# Altium PCB 信号层.PcbDoc
Units mm, origin at the board's own origin, x right, y up, seen from the top; angles counter-clockwise.
Board outline 50.8 x 35.56 mm, 2 copper layers (Top, Bottom); 47 components, 32 nets, 181 pads, 98 vias.
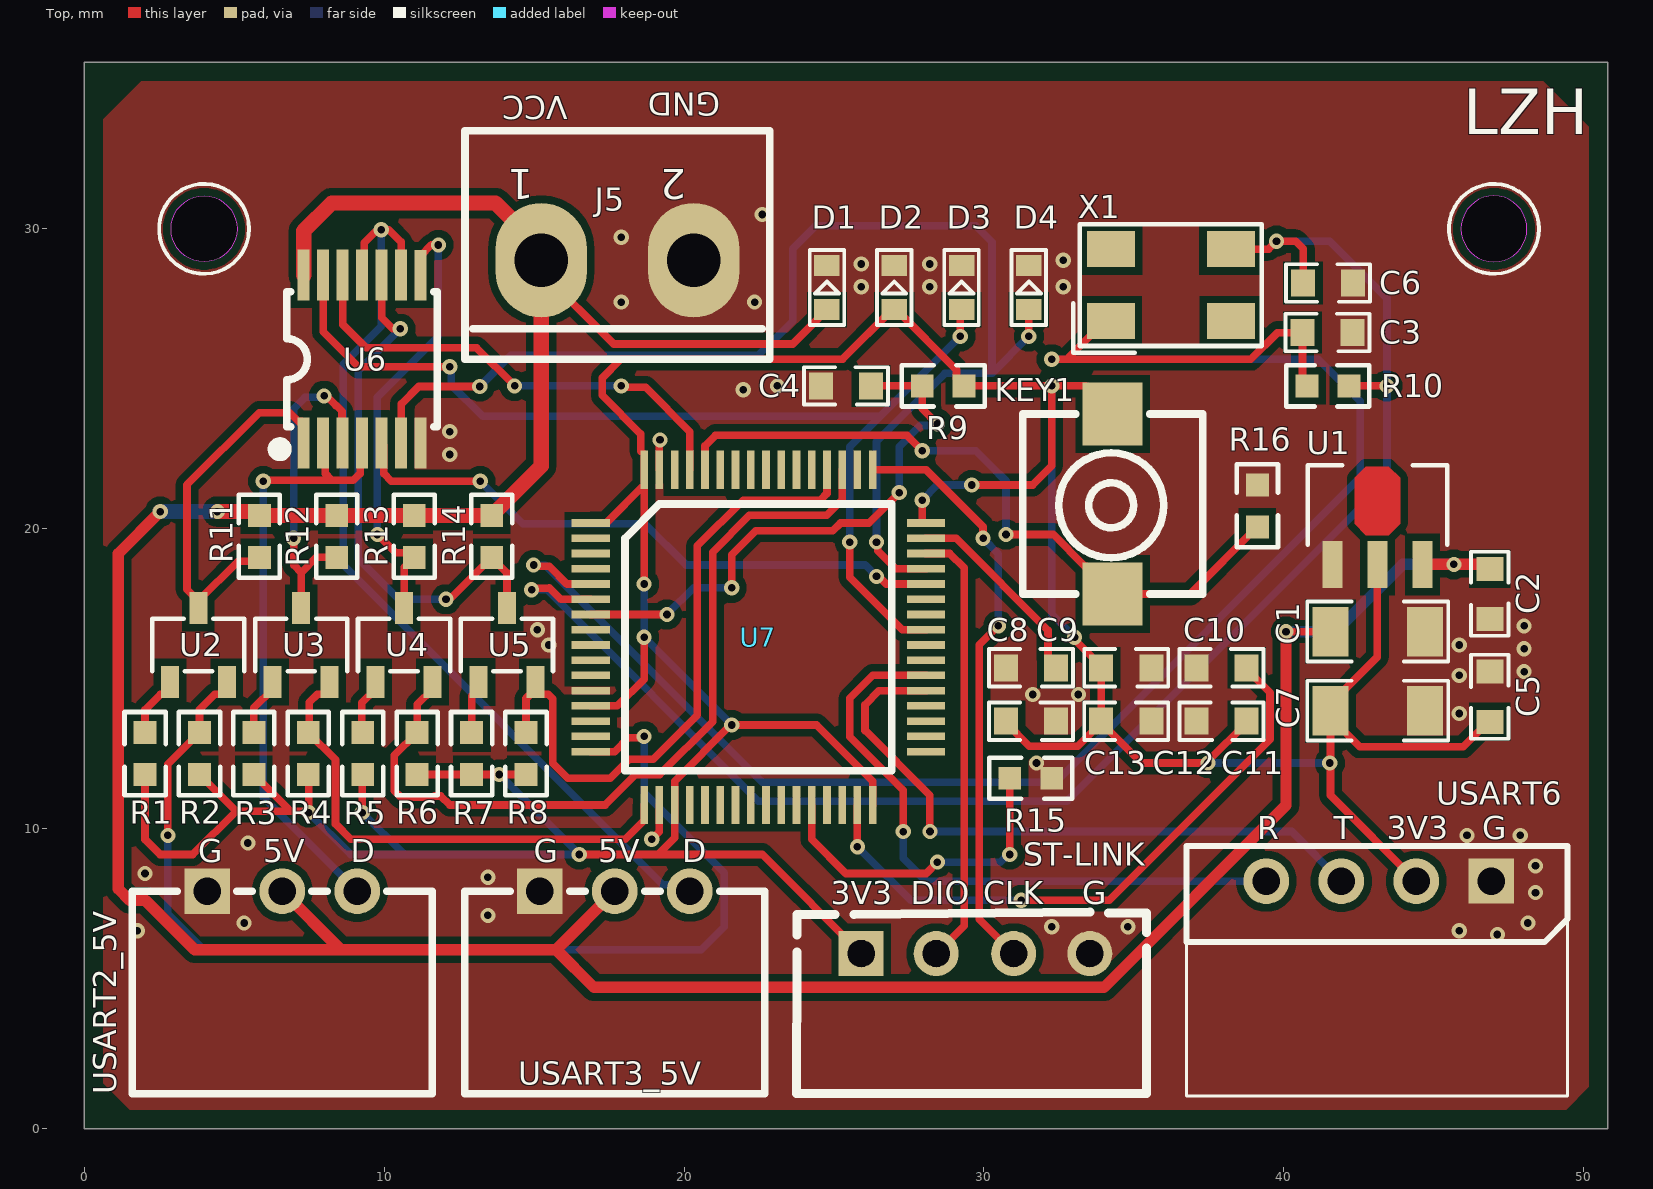
[diagram p0: Top view]
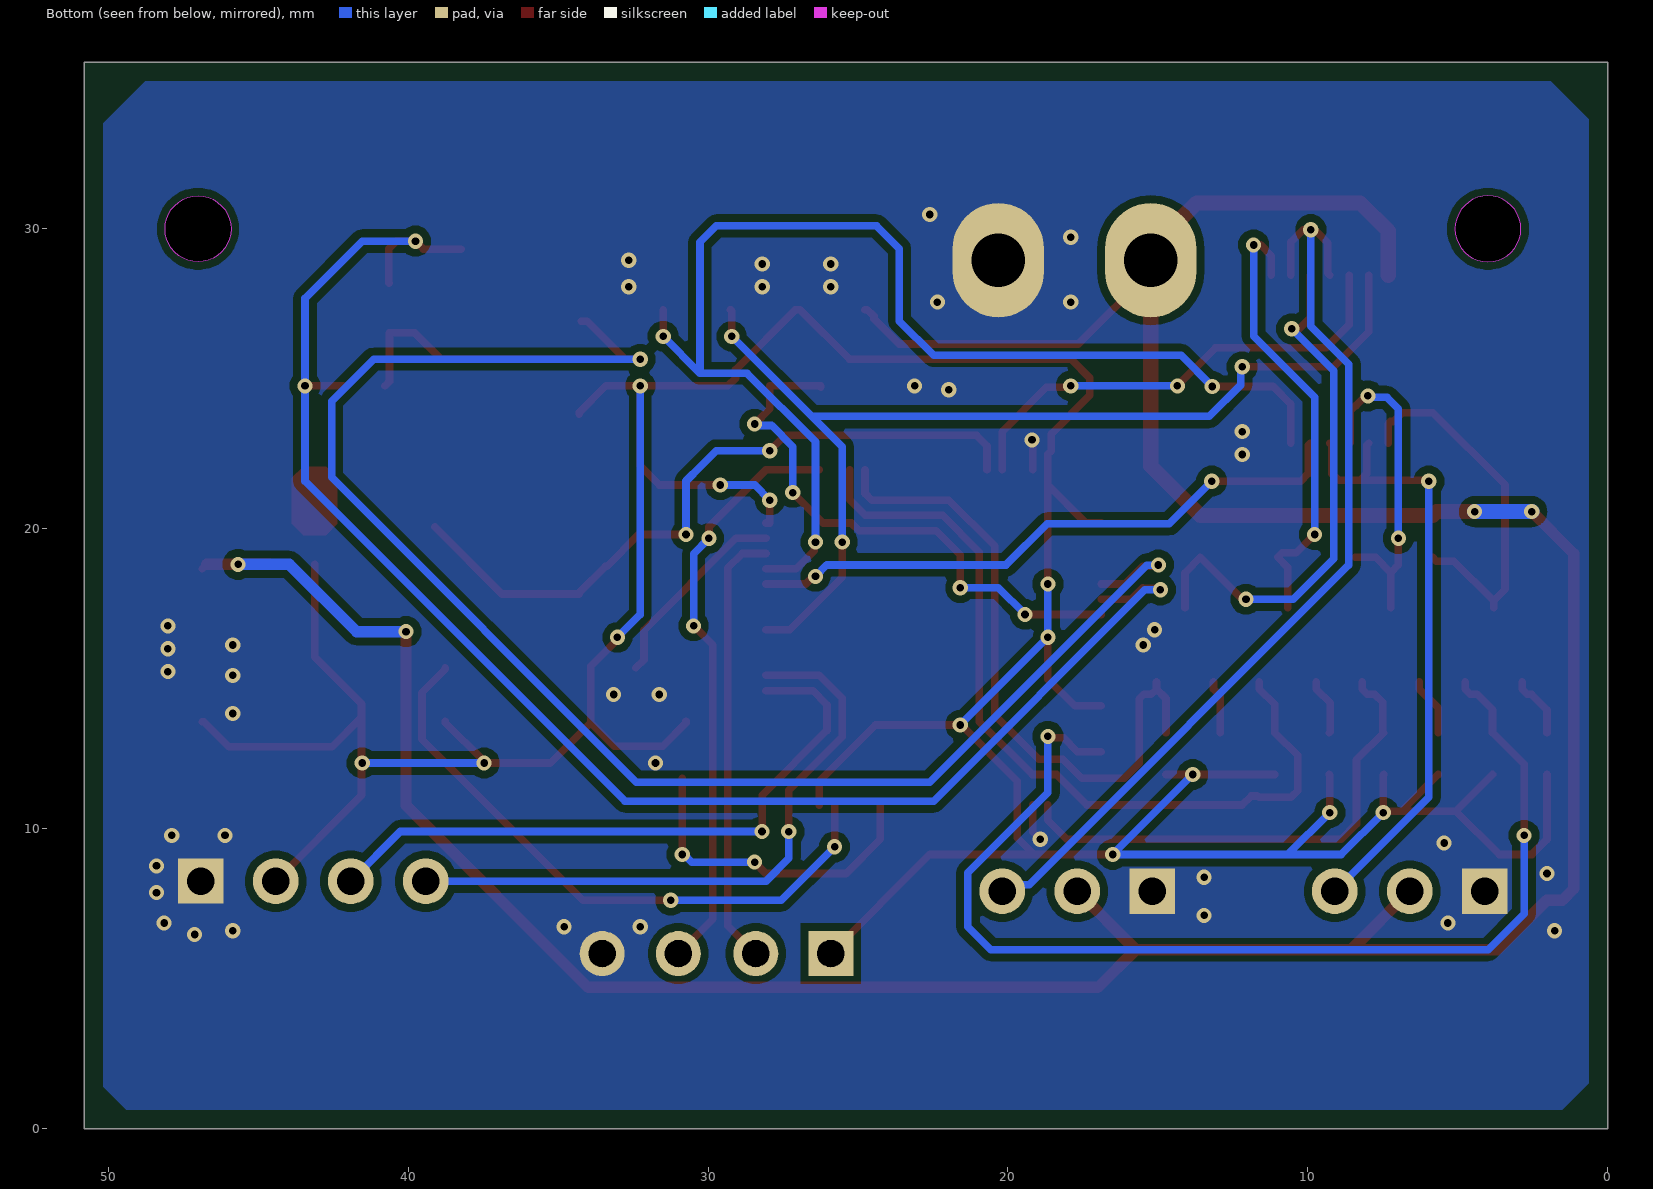
[diagram p1: Bottom view, seen from below]
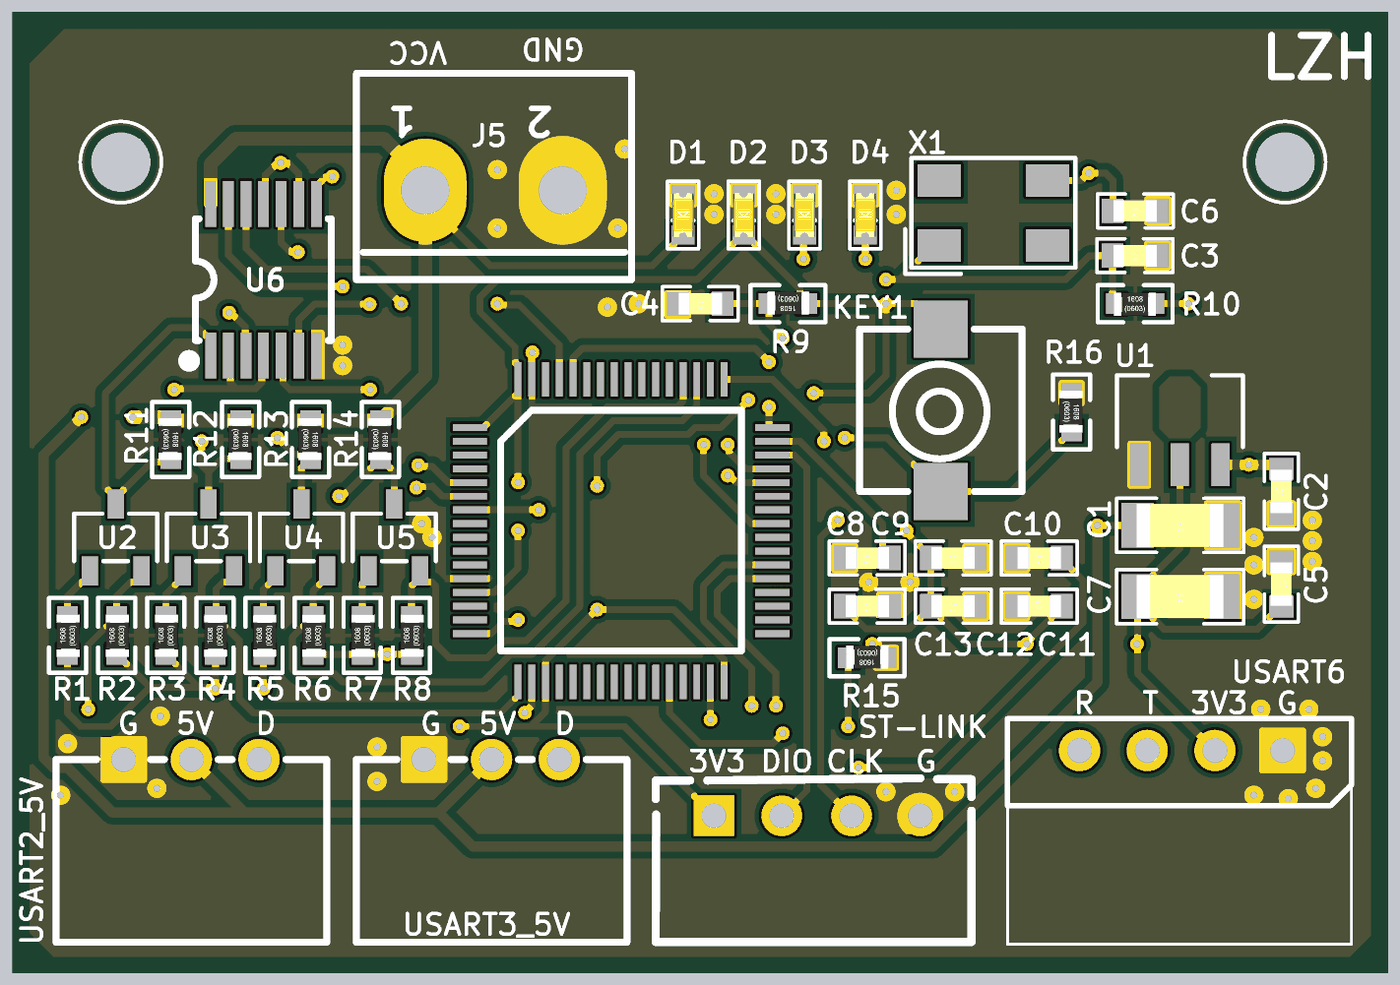
[diagram p2: 3D render of the assembled board from above, using the file's embedded part models]

## Layer stack, top to bottom
Top Solder: solder mask 0.0102, Solder Resist, Dk 3.5
Top: signal copper 0.0356
Dielectric 1: dielectric 0.32, FR-4, Dk 4.8
Bottom: signal copper 0.0356
Bottom Solder: solder mask 0.0102, Solder Resist, Dk 3.5

## Board outline
0,0 0,35.56 50.8,35.56 50.8,0
cut-out: 45.9,30 ccw(c47,30) 47,28.9 ccw(c47,30) 48.1,30 ccw(c47,30) 47,31.1 ccw(c47,30)
cut-out: 4,28.9 cw(c4,30) 2.9,30 cw(c4,30) 4,31.1 cw(c4,30) 5.1,30 cw(c4,30)

## Design rules (kind name [scope] priority, off if disabled: settings)
Clearance [All] p1: gap=0.254 ignorepadtopadclearanceinfootprint=FALSE except(0: Arc-Hole Track-Hole SMDPad-Hole THPad-Hole Via-Hole Fill-Hole Poly-Hole Region-Hole Text-Hole)
PolygonConnect PolygonConnect_5 [All vs IsNamedPolygon('GND_BOTTOM')] p1: connectstyle=Direct reliefconductorwidth=0.254 reliefentries=4 polygonreliefangle="90 Angle" airgapwidth=0.254
PolygonConnect PolygonConnect_4 [All vs IsNamedPolygon('GND_TOP')] p2: connectstyle=Direct reliefconductorwidth=0.254 reliefentries=4 polygonreliefangle="90 Angle" airgapwidth=0.254
PolygonConnect PolygonConnect_3 [All vs IsNamedPolygon('GND_BOTTOM')] p3: thpad.connectstyle=Relief thpad.reliefconductorwidth=0.508 thpad.reliefentries=4 thpad.polygonreliefangle="90 Angle" thpad.airgapwidth=0.254 smdpad.connectstyle=Relief smdpad.reliefconductorwidth=0.254 smdpad.reliefentries=4 smdpad.polygonreliefangle="90 Angle" smdpad.airgapwidth=0.254 via.connectstyle=Relief via.reliefconductorwidth=0.254 via.reliefentries=4 via.polygonreliefangle="90 Angle" via.airgapwidth=0.254
PolygonConnect PolygonConnect_2 [All vs IsNamedPolygon('GND_TOP')] p4: thpad.connectstyle=Relief thpad.reliefconductorwidth=0.508 thpad.reliefentries=4 thpad.polygonreliefangle="90 Angle" thpad.airgapwidth=0.254 smdpad.connectstyle=Relief smdpad.reliefconductorwidth=0.254 smdpad.reliefentries=4 smdpad.polygonreliefangle="90 Angle" smdpad.airgapwidth=0.254 via.connectstyle=Relief via.reliefconductorwidth=0.254 via.reliefentries=4 via.polygonreliefangle="90 Angle" via.airgapwidth=0.254
PolygonConnect PolygonConnect_1 [All vs IsNamedPolygon('GND_TOP')] p5: thpad.connectstyle=Relief thpad.reliefconductorwidth=0.508 thpad.reliefentries=4 thpad.polygonreliefangle="90 Angle" thpad.airgapwidth=0.254 smdpad.connectstyle=Relief smdpad.reliefconductorwidth=0.254 smdpad.reliefentries=4 smdpad.polygonreliefangle="90 Angle" smdpad.airgapwidth=0.254 via.connectstyle=Relief via.reliefconductorwidth=0.254 via.reliefentries=4 via.polygonreliefangle="90 Angle" via.airgapwidth=0.254
PolygonConnect [All] p6: connectstyle=Relief reliefconductorwidth=0.254 reliefentries=4 polygonreliefangle="90 Angle" airgapwidth=0.254
RoutingVias [All] p1: holewidth=0.711 width=1.27 viastyle="Through Hole" minholewidth=0.711 minwidth=1.27 maxholewidth=0.711 maxwidth=1.27
SolderMaskExpansion [All] p1: expansion=0.102 istentingtop=FALSE
Width [All] p1: maxlimit=0.254 minlimit=0.254 preferedwidth=0.254
30 further rules are at their usual default settings.

## Components (designator, comment, footprint, x,y, rotation, side; value= is the part's Value field where it differs from the comment)
C1 "22uF" 1206C 43.126,16.574 r180 top
C2 "104" 0603C 46.863,17.833 r90 top
C3 "104" 0603C 41.455,26.543 r180 top
C4 "104" 0603C 25.4,24.765 r180 top
C5 "104" 0603C 46.863,14.404 r270 top
C6 "104" 0603C 41.468,28.194 r180 top
C7 "22uF" 1206C 43.126,13.939 r180 top
C8 "104" 0603C 31.57,15.367 r180 top
C9 "104" 0603C 34.745,15.367 r180 top
C10 "104" 0603C 37.92,15.367 r180 top
C11 "104" 0603C 37.92,13.589 r0 top
C12 "104" 0603C 34.745,13.589 r180 top
C13 "104" 0603C 31.57,13.589 r180 top
D1 "LED0603" 0603Led 24.765,28.041 r270 top value=Color
D2 "LED0603" 0603Led 27.009,28.041 r270 top value=Color
D3 "LED0603" 0603Led 29.252,28.041 r270 top value=Color
D4 "LED0603" 0603Led 31.496,28.041 r270 top value=Color
J5 "KF301-5.0-2P" KF301-2P-DC 12.7,25.654 r0 top
KEY1 "KEY" KEY-SMD_2P-L6.0-W6.0-P6.00 34.29,20.828 r90 top
R1 "10K" 0603R 2.032,11.811 r90 top
R2 "10K" 0603R 3.846,11.811 r90 top
R3 "10K" 0603R 5.661,11.811 r90 top
R4 "10K" 0603R 7.475,11.811 r90 top
R5 "10K" 0603R 9.289,11.811 r90 top
R6 "10K" 0603R 11.103,11.811 r90 top
R7 "10K" 0603R 12.918,11.811 r90 top
R8 "10K" 0603R 14.732,11.811 r90 top
R9 "10K" 0603R 29.337,24.765 r180 top
R10 "10K" 0603R 40.767,24.765 r0 top
R11 "10K" 0603R 5.842,20.447 r270 top
R12 "10K" 0603R 8.424,20.447 r270 top
R13 "10K" 0603R 11.007,20.447 r270 top
R14 "10K" 0603R 13.589,20.447 r270 top
R15 "10K" 0603R 32.258,11.684 r180 top
R16 "10K" 0603R 39.116,21.463 r270 top
ST-LINK "XH_2.54_4P" XH-2.54_7P_2.54 33.528,5.842 r180 top (schematic designator J3)
U1 "CJA1117B-3.3V" SOT-89-3_L4.5-W2.5-P1.50-LS4.2-BR 43.116,20.171 r270 top
U2 "AP2306" SOT-23-3_L2.9-W1.6-P1.90-LS2.8-BR 3.81,16.129 r270 top
U3 "AP2306" SOT-23-3_L2.9-W1.6-P1.90-LS2.8-BR 7.239,16.129 r270 top
U4 "AP2306" SOT-23-3_L2.9-W1.6-P1.90-LS2.8-BR 10.668,16.129 r270 top
U5 "AP2306" SOT-23-3_L2.9-W1.6-P1.90-LS2.8-BR 14.097,16.129 r270 top
U6 "CD4066B" TSSOP-14_L5.0-W4.4-P0.65-LS6.4-BL 9.271,25.654 r0 top
U7 "STM32F405RGT" LQFP64 22.479,16.383 r0 top
USART2_5V "5264-3" 5264-3 6.604,7.922 r0 top (schematic designator J1)
USART3_5V "5264-3" 5264-3 17.693,7.922 r0 top (schematic designator J2)
USART6 "5264-4" 5264-4 46.91,8.255 r180 top (schematic designator J4)
X1 "8MHz" CRYSTAL-SMD_4P-L5.0-W3.2-BL 36.227,28.124 r0 top

## Footprints (in the part's own frame and the unit in brackets; to place one, negate y for a bottom-side part, rotate by r counter-clockwise, add the part's x,y. Pads: shape width x height; smd on the part's side, far side on the other; paste and mask are expansions set on the pad)
0603C [mm] "0603贴片"
  rect 0.8x0.9 smd: 1(-0.836,0) 2(0.836,0)
  silkscreen extent -1.4,-0.63 1.4,0.63, body extent -0.8,-0.4 0.8,0.4, height 0.73
0603Led [mm] "0603贴?"
  rect 0.7x0.85 smd: 1(-0.736,0) 2(0.736,0)
  silkscreen extent -1.25,-0.57 1.25,0.58, body extent -0.81,-0.4 0.81,0.4, height 0.62
0603R [mil] "0603贴片"
  rect 30x30 smd: 1(0,0) 2(55,0)
  silkscreen extent -27,-27 82,27, body extent -4,-18 58,16, height 18
1206C [mm] "1206贴片"
  rect 1.2x1.65 smd: 1(-1.575,0) 2(1.575,0)
  silkscreen extent -2.35,-1 2.35,1, body extent -1.6,-0.8 1.6,0.8, height 1.57
5264-3 [mil]
  rect 60x60 hole 36: 1(-98.43,0)
  round 60 hole 36: 2(0,0) 3(98.43,0)
  silkscreen extent -197,-266 197,0
5264-4 [mil]
  rect 60x59.05 hole 36: 1(0,0)
  round 60 hole 36: 2(98.43,0) 3(196.85,0) 4(295.28,0)
  silkscreen extent -100,-46 400,282, body extent -101,-16 391,283, height 197
CRYSTAL-SMD_4P-L5.0-W3.2-BL [mm]
  rect 1.6x1.2 smd: 1(-2,-1.2) 2(2,-1.2) 3(2,1.2) 4(-2,1.2)
  silkscreen extent -3.26,-2.26 3.03,2.03
KEY-SMD_2P-L6.0-W6.0-P6.00 [mm]
  rect 2.1x2 smd: 1(-3,0) 2(3,0)
  silkscreen extent -3,-3 3,3
KF301-2P-DC [mil]
  oval 120x150 hole 70: 1(100,130) 2(300,130)
  silkscreen extent 0,0 400,300
LQFP64 [mil]
  rect 50x10 smd: 1(-220,150) 2(-220,130) 3(-220,110) 4(-220,90) 5(-220,70) 6(-220,50) 7(-220,30) 8(-220,10) 9(-220,-10) 10(-220,-30) 11(-220,-50) 12(-220,-70) 13(-220,-90) 14(-220,-110) 15(-220,-130) 16(-220,-150) 33(220,-150) 34(220,-130) 35(220,-110) 36(220,-90) 37(220,-70) 38(220,-50) 39(220,-30) 40(220,-10) 41(220,10) 42(220,30) 43(220,50) 44(220,70) 45(220,90) 46(220,110) 47(220,130) 48(220,150)
  rect 10x50 smd: 17(-150,-220) 18(-130,-220) 19(-110,-220) 20(-90,-220) 21(-70,-220) 22(-50,-220) 23(-30,-220) 24(-10,-220) 25(10,-220) 26(30,-220) 27(50,-220) 28(70,-220) 29(90,-220) 30(110,-220) 31(130,-220) 32(150,-220) 49(150,220) 50(130,220) 51(110,220) 52(90,220) 53(70,220) 54(50,220) 55(30,220) 56(10,220) 57(-10,220) 58(-30,220) 59(-50,220) 60(-70,220) 61(-90,220) 62(-110,220) 63(-130,220) 64(-150,220)
  silkscreen extent -175,-175 175,175
SOT-23-3_L2.9-W1.6-P1.90-LS2.8-BR [mm]
  rect 1.07x0.6 smd: 1(1.235,-0.95) 2(1.235,0.95) 3(-1.235,0)
  silkscreen extent -0.88,-1.54 0.88,1.54
SOT-89-3_L4.5-W2.5-P1.50-LS4.2-BR [mm]
  rect 1.575x0.672 smd: 1(1.356,-1.5) 2(1.356,0) 3(1.356,1.5)
  Top region: 0.381,0.381 0,0.762 -1.524,0.762 -1.905,0.381 -1.905,-0.381 -1.524,-0.762 0,-0.762 0.381,-0.381
  silkscreen extent -1.95,-2.33 0.7,2.33
TSSOP-14_L5.0-W4.4-P0.65-LS6.4-BL [mm]
  rect 0.4x1.7 smd: 1(-1.95,-2.8) 2(-1.3,-2.8) 3(-0.65,-2.8) 4(0,-2.8) 5(0.65,-2.8) 6(1.3,-2.8) 7(1.95,-2.8) 8(1.95,2.8) 9(1.3,2.8) 10(0.65,2.8) 11(0,2.8) 12(-0.65,2.8) 13(-1.3,2.8) 14(-1.95,2.8)
  silkscreen extent -2.95,-3.2 2.5,2.25
XH-2.54_7P_2.54 [mm]
  rect 1.5x1.5 hole 0.9 slot 0.905 at 0 deg: 1(7.62,0)
  round 1.5 hole 0.9 slot 0.905 at 0 deg: 2(5.119,0) 3(2.539,0) 4(-0.001,0)
  silkscreen extent -1.89,-1.39 9.77,4.66

## Part data
C1 C7: library part CAP_1206
C2 C3 C4 C5 C6 C8 C9 C10 C11 C12 C13: library part CAP_0603
J5: "电源输入"
R1 R2 R3 R4 R5 R6 R7 R8 R9 R10 R11 R12 R13 R14 R15 R16: library part RES
ST-LINK: "端子"
U1: "STM32电源输入"
U2 U3 U4 U5: "NMOS"
U6: "双向传输门（FET开关）"
USART2_5V USART3_5V: "电机连接线"
USART6: "串口线"
X1: library part X1H008000DK1H-X, "无源晶体"

## Via types
v1: diameter 0.508, hole 0.254, Top to Bottom, 98 vias

## Nets (pads, with @x,y where several pads share a name; then routed paths per layer and width w, separated by ;. In a path a pad name is that pad's centre, name@x,y a point inside that pad or via, vN(x,y) a via of type N, cw(c..) or ccw(c..) an arc to the next point about the centre after c; other vN are vias at no path point)
3.3V: C5.2 C7.2 C9.2 C11.2 C12.2 C13.2 D2.2 KEY1.2 R1.1 R2.1 R3.1 R4.1 R5.1 R6.1 R7.1 R8.1 R9.1 ST-LINK.1 U1.2 U7.1 U7.13 U7.19 U7.32 U7.48 U7.64 USART6.2 | length 147.3
  Top w0.254: R1.1 2.032,9.643 2.531,9.144 3.622,9.144 5.068,10.59 ; R2.1 5.068,10.59 ; R3.1 6.882,10.59 ; R4.1 7.493,11.793 v1(7.493,10.541) 7.444,10.59 6.882,10.59 ; v1(9.271,10.541) 9.271,11.793 R5.1 ; R6.1 R7.1 v1(13.843,11.811) R8.1 ; v1(16.51,9.144) 18.827,9.144 19.133,9.144 ; U7.13 17.78,14.097 18.669,14.986 v1(18.669,16.383) ; U7.1 17.399,20.193 U7.64@18.669,21.463 ; v1(18.669,18.161) U7.64@18.669,21.463 ; ST-LINK.1 22.606,9.144 19.133,9.144 ; U7.32 26.289,11.588 24.415,13.462 v1(21.59,13.462) 21.559,13.462 19.685,11.588 19.685,9.696 19.133,9.144 ; v1(27.94,20.955) 27.94,20.193 U7.48 ; v1(29.591,21.463) 31.623,21.463 32.258,22.098 v1(32.258,24.765) ; C13.2 30.734,13.539 31.515,12.758 33.128,12.758 C12.2@33.909,13.539 ; v1(33.02,16.383) 33.069,16.334 33.069,16.257 33.909,15.417 C9.2 C12.2 C12.2@33.909,13.539 ; KEY1.2 34.29,23.878 33.403,24.765 v1(32.258,24.765) ; C11.2 38.756,13.539 37.465,12.248 v1(37.465,12.192) 35.256,12.192 C12.2@33.909,13.539 ; U1.2 43.116,15.728 41.551,14.164 C7.2 C7.2@41.551,13.714 ; USART6.2 41.551,11.114 C7.2@41.551,13.714 ; C5.2 46.813,13.568 45.977,12.733 42.533,12.733 C7.2@41.551,13.714 ; 5.068,10.59 6.882,10.59 ; U7.64@18.669,21.463 18.669,22.479 18.564,22.584 18.564,23.16 17.272,24.452 17.272,25.028 17.898,25.654 25.283,25.654 26.934,27.305 D2.2 27.084,27.305 29.083,25.306 29.083,25.019 R9.1 v1(32.258,24.765)
  Bottom w0.254: v1(7.493,10.541) 8.89,9.144 10.668,9.144 ; v1(9.271,10.541) 10.668,9.144 ; v1(13.843,11.811) v1(16.51,9.144) 10.668,9.144 ; v1(18.669,18.161) v1(18.669,16.383) v1(21.59,13.462) ; v1(27.94,20.955) 28.448,21.463 v1(29.591,21.463) ; v1(32.258,24.765) 32.258,17.145 v1(33.02,16.383) ; v1(37.465,12.192) v1(41.529,12.192)
5V: C1.2 C2.2 D1.2 J5.1 R11.1 R12.1 R13.1 R14.1 U1.3 U6.14 USART2_5V.2 USART3_5V.2 | length 119.7
  Top w0.254: R11.1@5.715,20.574 R11.1 ; J5.1@15.24,29.337 J5.1 15.24,28.575 17.653,26.162 23.622,26.162 24.467,27.007 24.467,27.082 24.69,27.305 D1.2 ; v1(40.068,16.574) C1.2 ; C2.2@46.717,18.815 C2.2
  Top w0.381: v1(2.54,20.574) 1.143,19.177 1.143,7.992 1.515,7.62 2.041,7.62 3.692,5.969 8.557,5.969 ; USART2_5V.2 8.557,5.969 ; USART3_5V.2 15.74,5.969 ; v1(40.068,16.574) 40.068,10.781 33.998,4.711 16.998,4.711 15.74,5.969 ; U1.3 v1(45.666,18.815) C2.2@46.717,18.815 ; 8.557,5.969 15.74,5.969
  Top w0.508: v1(4.445,20.574) R11.1@5.715,20.574 ; R11.1 R12.1 R13.1 R14.1 15.24,22.098 J5.1@15.24,28.575 ; U6.14 7.321,29.927 8.255,30.861 13.716,30.861 J5.1@15.24,29.337
  Bottom w0.381: v1(40.068,16.574) 41.72,16.574 43.961,18.815 v1(45.666,18.815)
  Bottom w0.508: v1(2.54,20.574) v1(4.445,20.574)
GND: C1.1 C2.1 C3.1 C4.2 C5.1 C6.1 C7.1 C8.2 C9.1 C10.2 C11.1 C12.1 C13.1 D1.1 D2.1 D3.1 D4.1 J5.2 R15.1 R16.1 ST-LINK.4 U1.1 U6.7 U7.12 U7.18 U7.63 USART2_5V.1 USART3_5V.1 USART6.1 | length 2.3
  Top w0.254: v1(18.923,9.652) 19.177,9.906 U7.18 ; U7.63 19.177,22.943 v1(19.199,22.965)
  other v1: 47.117,6.477 1.778,6.604 45.847,6.604 32.258,6.731 34.798,6.731 5.334,6.858 48.133,6.858 13.462,7.112 48.387,7.874 13.462,8.382 2.032,8.509 48.387,8.763 5.461,9.525 46.101,9.779 47.879,9.779 31.75,12.192 45.847,13.843 31.623,14.478 33.147,14.478 45.847,15.113 48.006,15.24 48.006,16.002 15.494,16.129 45.847,16.129 15.113,16.637 48.006,16.764 12.192,22.479 12.192,23.241 21.971,24.638 23.114,24.765 17.907,27.559 22.352,27.559 25.908,28.067 28.194,28.067 32.639,28.067 25.908,28.829 28.194,28.829 32.639,28.956 17.907,29.718 22.606,30.48
NetC8_1: C8.1 U7.47 | length 6.7
  Top w0.254: U7.47 29.07,19.685 32.133,16.623 32.133,15.64 C8.1
NetC10_1: C10.1 U7.31 | length 20.8
  Top w0.254: v1(25.781,9.398) U7.31 ; v1(31.242,7.62) 34.175,7.62 39.537,12.981 39.537,14.536 38.756,15.317 C10.1
  Bottom w0.254: v1(25.781,9.398) 27.559,7.62 v1(31.242,7.62)
NetKEY1_1: KEY1.1 R16.2 U7.60 | length 23.5
  Top w0.254: U7.60 20.701,22.764 21.051,23.114 27.432,23.114 v1(27.94,22.606) ; v1(30.734,19.812) 32.306,19.812 33.367,18.751 33.417,18.751 34.29,17.878 KEY1.1 36.878,17.828 R16.2
  Bottom w0.254: v1(27.94,22.606) 29.718,22.606 30.226,22.098 30.231,22.098 30.734,21.595 v1(30.734,19.812)
NetR1_2: R1.2 U2.1 | length 2.1
  Top w0.254: R1.2 2.032,13.97 2.548,14.486 2.687,14.486 2.86,14.659 U2.1
NetR3_2: R3.2 U3.1 | length 1.9
  Top w0.254: R3.2 5.661,14.031 6.289,14.659 U3.1
NetR5_2: R5.2 U4.1 | length 1.9
  Top w0.254: R5.2 9.256,13.242 9.256,14.197 9.718,14.659 U4.1
NetR7_2: R7.2 U5.1 | length 1.8
  Top w0.254: R7.2 12.918,14.43 13.147,14.659 U5.1
NetR15_2: R15.2 U7.28 | length 11
  Top w0.254: U7.28 24.257,9.652 25.4,8.509 28.067,8.509 v1(28.448,8.89) ; v1(30.861,9.144) R15.2
  Bottom w0.254: v1(28.448,8.89) 30.538,8.89 30.792,9.144 v1(30.861,9.144)
OSC_IN: C3.2 R10.1 U7.5 X1.1 | length 62.9
  Top w0.254: v1(14.986,18.796) 15.035,18.747 15.512,18.747 16.098,18.161 U7.5 ; v1(32.258,25.654) 32.757,25.654 ; X1.1 34.027,26.924 32.757,25.654 ; R10.1 40.619,24.913 C3.2 39.785,26.543 38.896,25.654 32.757,25.654
  Bottom w0.254: v1(14.986,18.796) 14.991,18.791 15.372,18.791 22.606,11.557 32.385,11.557 42.545,21.717 42.545,24.257 41.148,25.654 v1(32.258,25.654)
OSC_OUT: C6.2 R10.2 U7.6 X1.3 | length 53.6
  Top w0.254: v1(14.918,17.966) 14.967,18.015 15.487,18.015 15.507,18.034 15.888,17.653 U7.6 ; X1.3 39.484,29.324 v1(39.751,29.591) 40.386,29.591 40.64,29.337 40.64,28.201 C6.2 ; R10.2 v1(43.434,24.765)
  Bottom w0.254: v1(14.918,17.966) 15.435,17.966 22.479,10.922 32.766,10.922 43.434,21.59 v1(43.434,24.765) 43.434,27.686 41.529,29.591 v1(39.751,29.591)
RESET: C4.1 R9.2 U7.7 | length 19
  Top w0.254: U7.7 v1(19.431,17.145) ; v1(21.59,18.034) 21.59,19.137 22.392,19.939 24.963,19.939 25.217,20.193 26.162,20.193 v1(27.178,21.209) ; C4.1@26.236,24.715 C4.1 R9.2 27.94,24.003 v1(28.448,23.495)
  Bottom w0.254: v1(19.431,17.145) 20.32,18.034 v1(21.59,18.034) ; v1(27.178,21.209) 27.178,22.742 27.882,23.446 28.399,23.446 v1(28.448,23.495)
SWCLK: ST-LINK.3 U7.49 | length 19.6
  Top w0.254: U7.49 28.067,21.971 29.967,20.071 29.967,19.686 v1(29.97,19.683) ; v1(30.48,16.764) 29.845,16.129 29.845,6.986 ST-LINK.3
  Bottom w0.254: v1(29.97,19.683) 29.97,19.678 30.48,19.168 v1(30.48,16.764)
SWDIO: ST-LINK.2 U7.46 | length 14.7
  Top w0.254: U7.46 28.86,19.177 29.337,18.7 29.337,6.77 ST-LINK.2
U2_RX_CON: U6.5 U7.44 | length 20.6
  Top w0.254: U6.5 9.99,22.785 9.99,21.846 10.246,21.59 v1(13.208,21.59) ; v1(26.416,18.415) 26.485,18.415 26.739,18.161 U7.44
  Bottom w0.254: v1(13.208,21.59) 14.629,20.169 18.693,20.169 20.066,18.796 26.035,18.796 v1(26.416,18.415)
U2_TX_CON: D3.2 U6.13 U7.41 | length 35.7
  Top w0.254: U6.13 7.971,26.573 9.144,25.4 v1(12.192,25.4) ; v1(25.527,19.558) 25.527,18.384 27.274,16.637 U7.41 ; v1(29.21,26.416) 29.21,27.263 D3.2
  Bottom w0.254: v1(12.192,25.4) 12.241,25.351 12.241,24.795 13.286,23.749 26.543,23.749 ; v1(25.527,19.558) 25.527,22.733 26.543,23.749 ; v1(29.21,26.416) 26.543,23.749
U3_RX_CON: U6.12 U7.61 | length 16
  Top w0.254: U6.12 8.621,26.812 9.398,26.035 13.081,26.035 v1(14.351,24.765) ; v1(17.907,24.765) 17.956,24.716 18.718,24.716 20.193,23.241 U7.61
  Bottom w0.254: v1(14.351,24.765) v1(17.907,24.765)
U3_TX_CON: D4.2 U6.6 U7.45 | length 42.4
  Top w0.254: U6.6 10.571,24.16 11.156,24.745 v1(13.188,24.745) ; v1(26.416,19.558) 26.465,19.509 26.465,19.264 27.06,18.669 U7.45 ; v1(31.496,26.416) D4.2
  Bottom w0.254: v1(13.188,24.745) 14.224,25.781 22.479,25.781 23.622,26.924 23.622,29.337 24.384,30.099 29.718,30.099 30.269,29.548 30.269,25.189 ; v1(26.416,19.558) 26.416,22.904 28.701,25.189 30.269,25.189 ; v1(31.496,26.416) 30.269,25.189
USART2_OUT: U6.2 U6.4 USART2_5V.3 | length 20.7
  Top w0.254: v1(5.969,21.59) 6.002,21.623 8.263,21.623 ; U6.2 8.04,22.785 8.04,21.846 8.263,21.623 ; U6.4 9.202,22.785 9.202,21.846 8.979,21.623 8.263,21.623
  Bottom w0.254: v1(5.969,21.59) 5.969,11.057 USART2_5V.3
USART2_RX: R4.2 U3.2 U7.17 | length 16.8
  Top w0.254: U3.2 8.189,14.659 8.016,14.486 7.781,14.486 7.511,14.216 7.511,13.244 R4.2 8.382,12.301 8.382,10.16 8.89,9.652 18.034,9.652 18.669,10.287 U7.17
USART2_RX_5V: R12.2 U3.3 U6.3 | length 11.2
  Top w0.254: v1(6.985,19.685) 6.985,18.796 7.239,18.542 ; U3.3 7.239,18.542 ; v1(8.001,24.433) 8.07,24.433 8.39,24.113 8.399,24.113 8.599,23.913 8.599,22.876 U6.3 ; R12.2 7.747,19.05 7.239,18.542
  Bottom w0.254: v1(6.985,19.685) 6.985,24.003 7.366,24.384 7.952,24.384 v1(8.001,24.433)
USART2_TX: R2.2 U2.2 U7.16 | length 37.5
  Top w0.254: v1(2.794,9.779) 2.794,12.156 R2.2 3.846,13.97 4.362,14.486 4.587,14.486 4.76,14.659 U2.2 ; U7.16 17.684,12.573 18.143,13.032 18.62,13.032 v1(18.669,13.081)
  Bottom w0.254: v1(2.794,9.779) 2.794,7.169 3.994,5.969 20.574,5.969 21.336,6.731 21.336,8.538 18.669,11.205 v1(18.669,13.081)
USART2_TX_5V: R11.2 U2.3 U6.1 | length 12.6
  Top w0.254: U2.3 U2.3@3.81,17.599 ; R11.2 5.715,18.923 5.134,18.923 U2.3@3.81,17.599 ; U6.1 7.321,23.504 7.248,23.577 7.157,23.577 6.858,23.876 5.842,23.876 3.429,21.463 3.429,17.98 U2.3@3.81,17.599
USART3_OUT: U6.9 U6.11 USART3_5V.3 | length 31.6
  Top w0.254: U6.11 9.34,28.523 9.34,29.533 9.779,29.972 v1(9.906,29.972) 10.16,29.972 10.571,29.561 U6.9
  Bottom w0.254: v1(9.906,29.972) 9.906,26.753 8.636,25.483 8.636,18.796 19.297,8.135 19.98,8.135 USART3_5V.3
USART3_RX: R8.2 U5.2 U7.52 | length 22.1
  Top w0.254: R8.2 14.732,14.344 U5.2@15.047,14.659 ; U5.2 U5.2@15.047,14.659 ; U7.52 24.765,21.178 24.542,20.955 21.971,20.955 20.447,19.431 20.447,13.787 18.979,12.319 18.174,12.319 17.539,11.684 16.129,11.684 15.621,12.192 15.621,14.337 15.472,14.486 15.22,14.486 U5.2@15.047,14.659
USART3_RX_5V: R14.2 U5.3 U6.10 | length 17.9
  Top w0.254: U6.10 9.921,27.036 10.287,26.67 v1(10.541,26.67) ; v1(12.065,17.653) 12.114,17.702 12.241,17.702 R14.2 14.097,18.542 U5.3
  Bottom w0.254: v1(10.541,26.67) 9.144,25.273 9.144,19.006 10.497,17.653 v1(12.065,17.653)
USART3_TX: R6.2 U4.2 U7.51 | length 27.8
  Top w0.254: U4.2 11.618,14.659 11.103,14.145 R6.2 10.341,12.446 10.341,11.272 10.565,11.049 11.642,11.049 11.685,11.092 11.895,11.092 12.192,10.795 17.368,10.795 18.384,11.811 19.19,11.811 20.955,13.576 20.955,19.221 22.181,20.447 24.752,20.447 25.006,20.701 25.273,20.968 U7.51
USART3_TX_5V: R13.2 U4.3 U6.8 | length 15.3
  Top w0.254: v1(9.779,19.812) 10.393,19.198 10.859,19.198 R13.2 10.668,18.711 U4.3 ; U6.8 11.221,29.104 11.581,29.464 v1(11.811,29.464)
  Bottom w0.254: v1(9.779,19.812) 9.779,24.393 11.811,26.425 v1(11.811,29.464)
USART6_RX: U7.38 USART6.4 | length 21.3
  Top w0.254: v1(27.305,9.906) 27.305,11.29 25.527,13.068 25.527,14.351 26.289,15.113 U7.38
  Bottom w0.254: v1(27.305,9.906) 27.305,9.017 28.067,8.255 USART6.4
USART6_TX: U7.37 USART6.3 | length 21.7
  Top w0.254: U7.37 26.499,14.605 26.035,14.141 26.035,13.279 28.194,11.12 28.194,9.915 v1(28.199,9.911)
  Bottom w0.254: v1(28.199,9.911) 40.254,9.911 USART6.3
pads on no net: U7.2 U7.3 U7.4 U7.8 U7.9 U7.10 U7.11 U7.14 U7.15 U7.20 U7.21 U7.22 U7.23 U7.24 U7.25 U7.26 U7.27 U7.29 U7.30 U7.33 U7.34 U7.35 U7.36 U7.39 U7.40 U7.42 U7.43 U7.50 U7.53 U7.54 U7.55 U7.56 U7.57 U7.58 U7.59 U7.62 X1.2 X1.4

## Polygon pours and split planes (outlines as drawn)
GND on Top "GND_TOP" (solid, pour order 4): 1.905,34.925 0.635,33.655 0.635,1.524 1.524,0.635 49.403,0.635 50.165,1.397 50.165,33.401 48.641,34.925
GND on Bottom "GND_BOTTOM" (solid, pour order 5): 1.905,34.925 0.635,33.655 0.635,1.524 1.524,0.635 49.403,0.635 50.165,1.397 50.165,33.528 48.768,34.925 48.641,34.925

## Other copper
Top:
  pour cut-out: 45.9,30 ccw(c47,30) 47,28.9 ccw(c47,30) 48.1,30 ccw(c47,30) 47,31.1 ccw(c47,30)
  pour cut-out: 4,28.9 cw(c4,30) 2.9,30 cw(c4,30) 4,31.1 cw(c4,30) 5.1,30 cw(c4,30)
Bottom:
  pour cut-out: 4,28.9 cw(c4,30) 2.9,30 cw(c4,30) 4,31.1 cw(c4,30) 5.1,30 cw(c4,30)
  pour cut-out: 45.9,30 ccw(c47,30) 47,28.9 ccw(c47,30) 48.1,30 ccw(c47,30) 47,31.1 ccw(c47,30)

## Silkscreen, mask and mechanical layers (free items; w line width, h text height)
Top Overlay:
  circle w0.127: c4,30 r1.5
  circle w0.127: c47,30 r1.5
  text "LZH" at 45.974,33.147 h1.52
  text "R" at 39.116,9.652 h0.76
  text "T" at 41.656,9.652 h0.76
  text "3V3" at 43.434,9.652 h0.76
  text "G" at 46.609,9.652 h0.76
  text "G" at 3.81,8.89 h0.76
  text "5V" at 5.969,8.89 h0.76
  text "D" at 8.89,8.89 h0.76
  text "G" at 14.986,8.89 h0.76
  text "5V" at 17.145,8.89 h0.76
  text "D" at 19.939,8.89 h0.76
  text "3V3" at 24.892,7.493 h0.76
  text "DIO" at 27.559,7.493 h0.76
  text "CLK" at 29.972,7.493 h0.76
  text "G" at 33.274,7.493 h0.76
Mechanical 1:
  circle w0.254: c4,30 r1.1
  circle w0.254: c47,30 r1.1
  lines w0.254: 0,0 50.8,0 50.8,35.56 0,35.56 0,0

## Text inside footprints (layer, text, board x,y; h text height)
J5: Top Overlay "1" at 14.986,31.996 h1 r180; Top Overlay "2" at 20.066,31.996 h1 r180; Top Overlay "VCC" at 16.129,34.417 h0.76 r180; Top Overlay "GND" at 21.209,34.544 h0.76 r180